# Altium PCB PCB1.PcbDoc
Units mil, origin at the board's own origin, x right, y up, seen from the top; angles counter-clockwise.
Board outline 1690 x 1775 mil, 2 copper layers (Top Layer, Bottom Layer); 25 components, 15 nets, 67 pads, 19 vias.
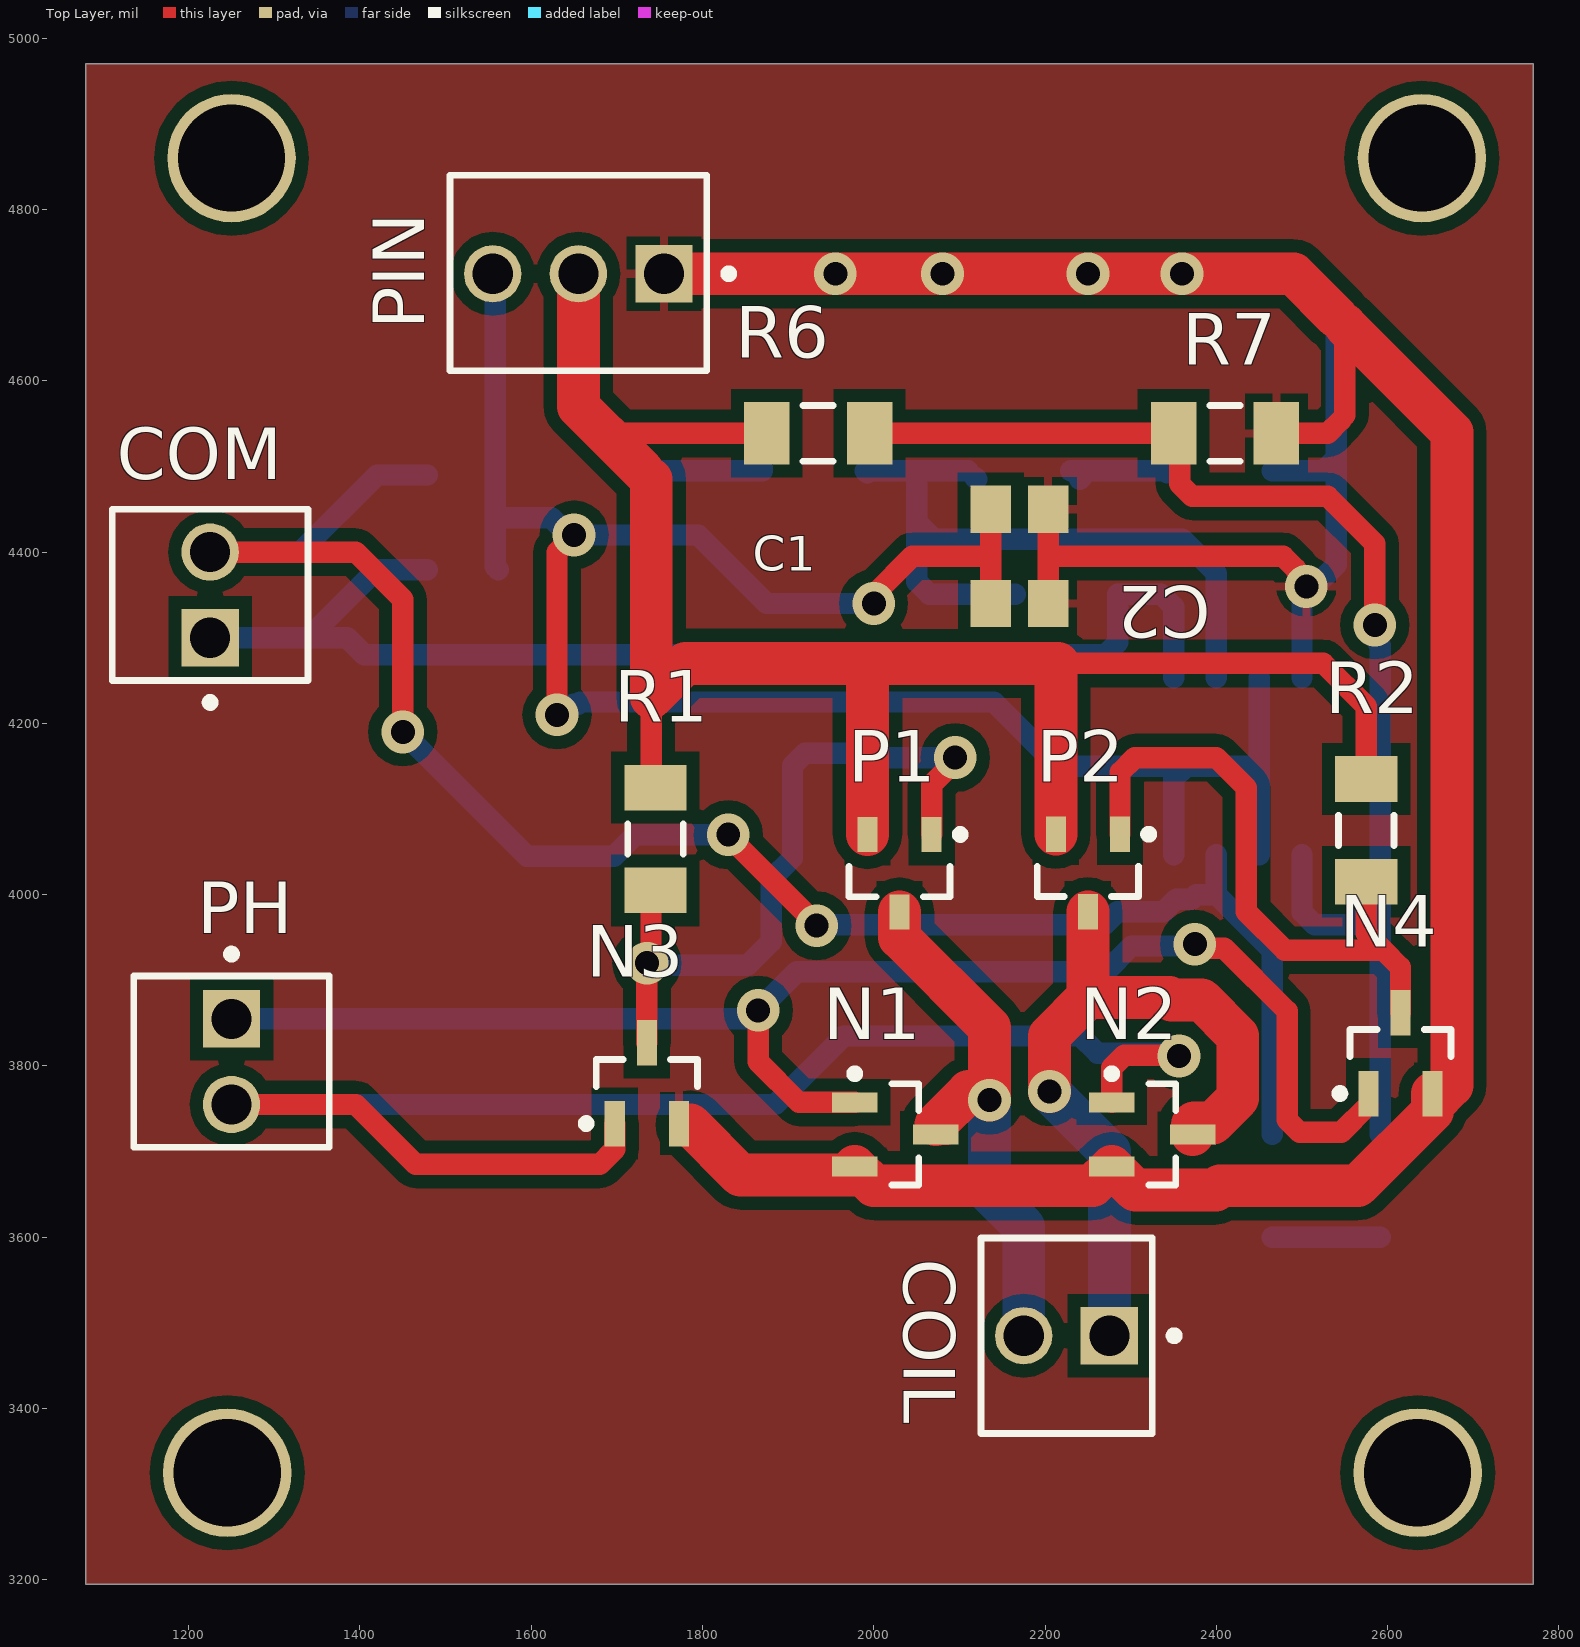
[diagram p0: Top Layer view]
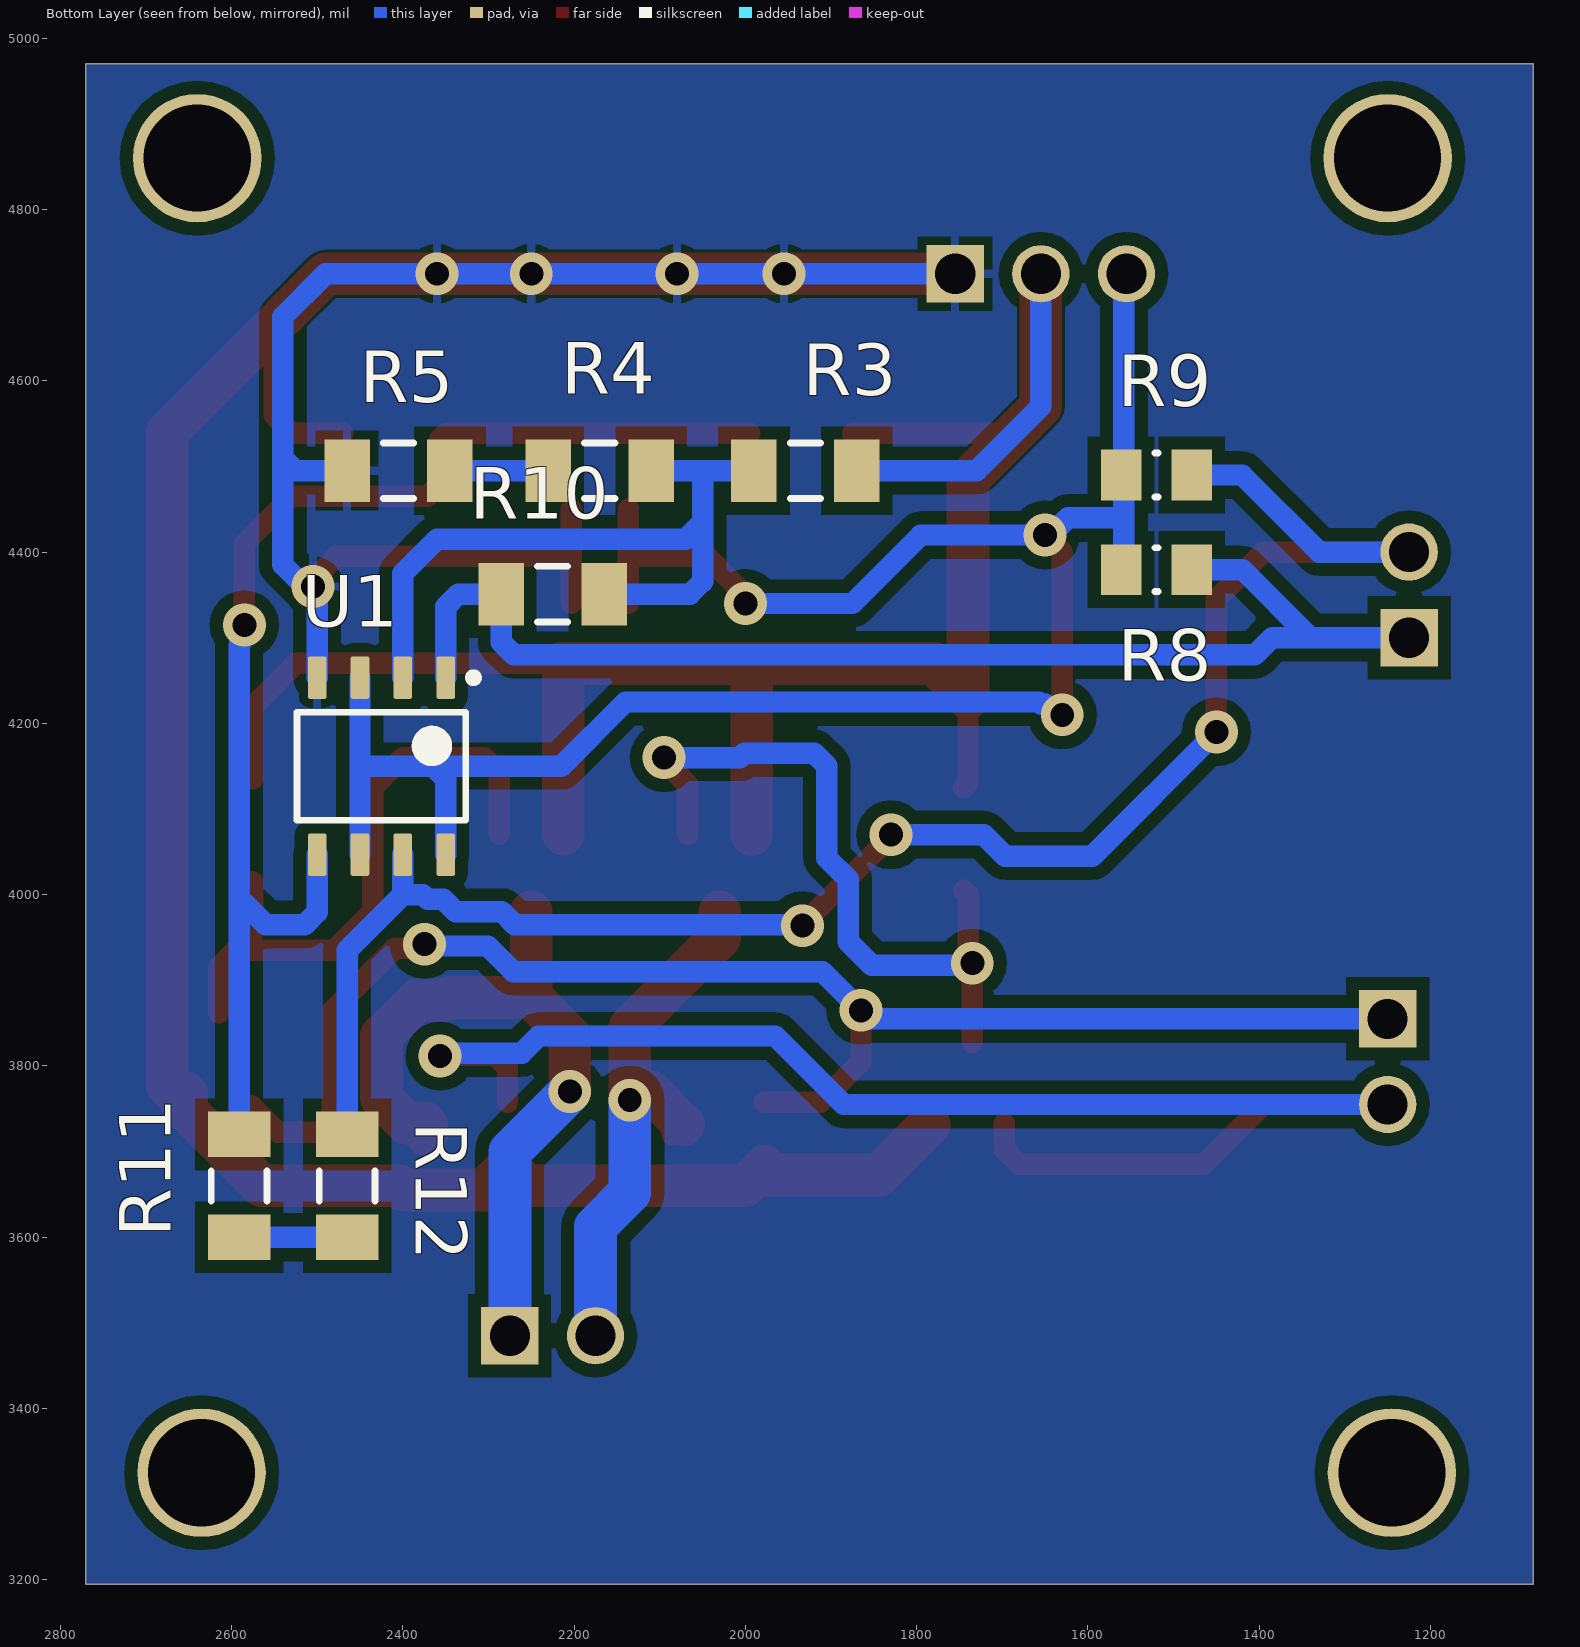
[diagram p1: Bottom Layer view, seen from below]
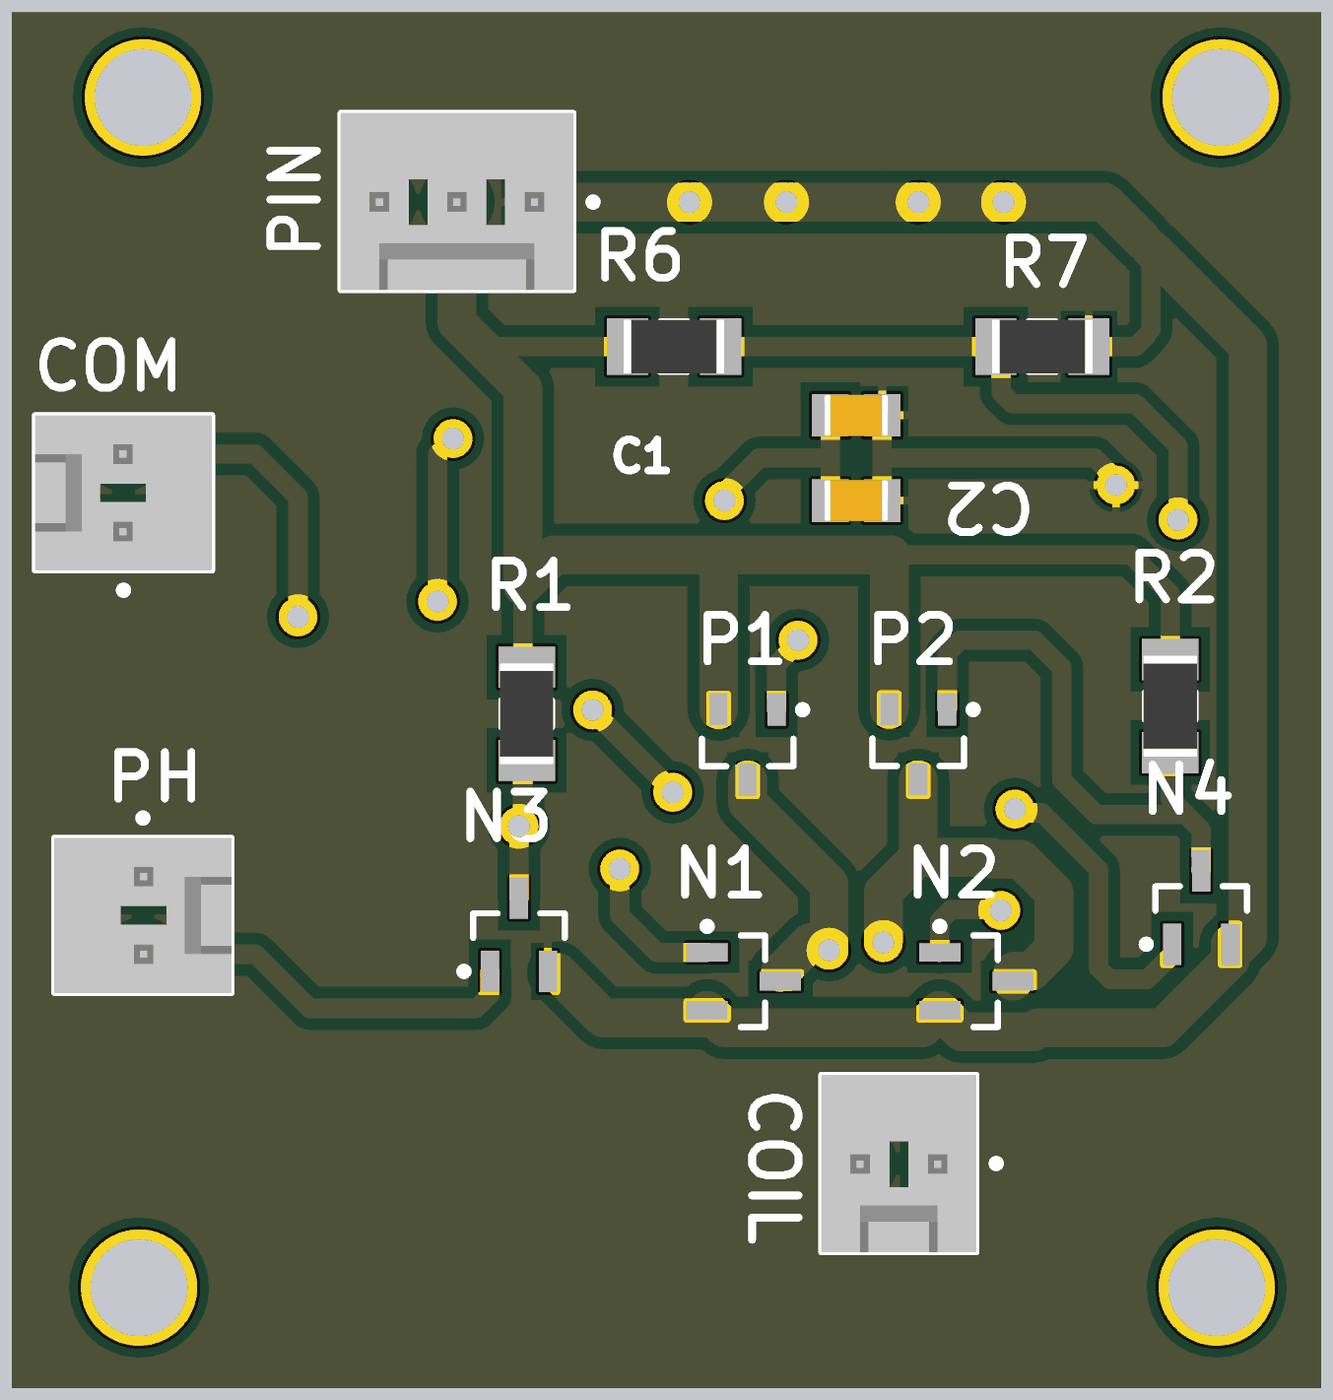
[diagram p2: 3D render of the assembled board from above, using the file's embedded part models]
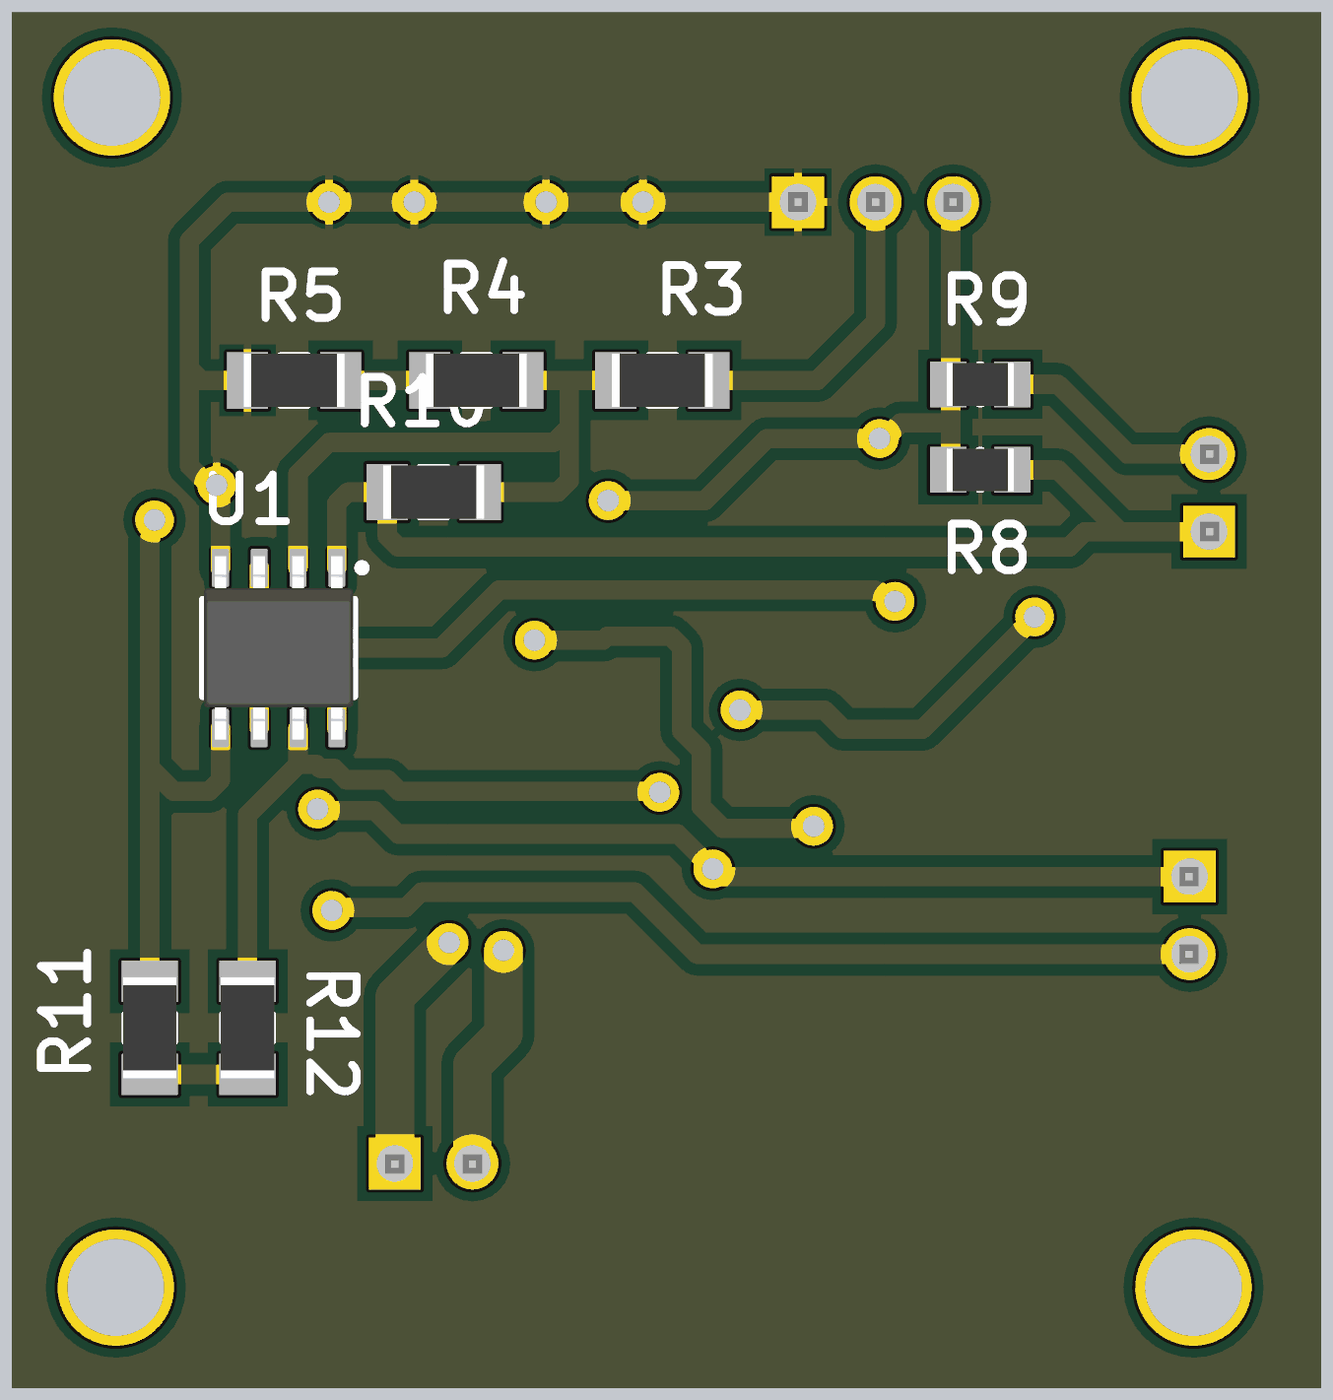
[diagram p3: 3D render of the assembled board from below, using the file's embedded part models]

## Layer stack, top to bottom
Top Solder: solder mask 0.4, Solder Resist, Dk 3.5
Top Layer: signal copper 1.4
Dielectric 1: dielectric 12.6, FR-4, Dk 4.8
Bottom Layer: signal copper 1.4
Bottom Solder: solder mask 0.4, Solder Resist, Dk 3.5

## Board outline
1080,3195 1080,4970 2770,4970 2770,3195

## Design rules (kind name [scope] priority, off if disabled: settings)
Clearance [All] p1: gap=15 ignorepadtopadclearanceinfootprint=FALSE
PolygonConnect [All] p1: connectstyle=Relief reliefconductorwidth=10 reliefentries=4 polygonreliefangle="90 Angle" airgapwidth=10
RoutingVias [All] p1: holewidth=28 width=50 viastyle="Through Hole" minholewidth=28 minwidth=50 maxholewidth=28 maxwidth=50
SolderMaskExpansion [All] p1: expansion=4 istentingtop=FALSE
Width [All] p1: maxlimit=50 minlimit=25 preferedwidth=25 minimp=50.000000 maximp=50.000000 favimp=50.000000
30 further rules are at their usual default settings.

## Components (designator, comment, footprint, x,y, rotation, side; value= is the part's Value field where it differs from the comment)
C1 "Capacitor 10 uF +/- 10% 16 V 0805" CAPC2013X135X45NL10T25 2170,4450 r180 top value=8n
C2 "Capacitor 10 uF +/- 10% 16 V 0805" CAPC2013X135X45NL10T25 2170,4340 r180 top value=8n
COIL "22-27-2021" MOLX-22-27-2021_V 2225,3485 r180 top
COM "22-27-2021" MOLX-22-27-2021_V 1225,4350 r90 top
N1 "2N7002" INF-PG-SOT23_M 2025,3720 r0 top
N2 "2N7002" INF-PG-SOT23_M 2325,3720 r0 top
N3 "2N7002" INF-PG-SOT23_M 1735,3780 r90 top
N4 "2N7002" INF-PG-SOT23_M 2615,3815 r90 top
P1 "BSS84P" INF-PG-SOT23_N 2030,4025 r270 top
P2 "BSS84P" INF-PG-SOT23_N 2250,4025.28 r270 top
PH "22-27-2021" MOLX-22-27-2021_V 1250,3805 r270 top
PIN "22-27-2031" MOLX-22-27-2031_V 1655,4725 r180 top
R1 "Resistor 100k +/-1% 1206 250 mW" RESC3216X60X45ML15T20 1745,4065 r90 top value=100k
R2 "Resistor 100k +/-1% 1206 250 mW" RESC3216X60X45ML15T20 2575,4075 r90 top value=100k
R3 "Resistor 100k +/-1% 1206 250 mW" RESC3216X60X45ML15T20 1930,4495 r180 bottom value=100k
R4 "Resistor 100k +/-1% 1206 250 mW" RESC3216X60X45ML15T20 2170,4495 r180 bottom value=100k
R5 "Resistor 100k +/-1% 1206 250 mW" RESC3216X60X45ML15T20 2405,4495 r180 bottom value=374K
R6 "Resistor 100k +/-1% 1206 250 mW" RESC3216X60X45ML15T20 1935,4538.62 r180 top value=100k
R7 "Resistor 100k +/-1% 1206 250 mW" RESC3216X60X45ML15T20 2410,4538.62 r180 top value=100k
R8 "Resistor 10k +/-1% 0805 125 mW" RESC2013X50X35ML15T15 1520,4379.6 r180 bottom value=10k
R9 "Resistor 10k +/-1% 0805 125 mW" RESC2013X50X35ML15T15 1520,4490 r180 bottom value=10k
R10 "Resistor 100k +/-1% 1206 250 mW" RESC3216X60X45ML15T20 2225,4350.95 r180 bottom value=100k
R11 "Resistor 100k +/-1% 1206 250 mW" RESC3216X60X45ML15T20 2591.15,3660 r90 bottom value=100k
R12 "Resistor 100k +/-1% 1206 250 mW" RESC3216X60X45ML15T20 2465,3660 r270 bottom value=33k
U1 "LM393M" D0008A_L 2425,4150 r270 bottom

## Footprints (in the part's own frame and the unit in brackets; to place one, negate y for a bottom-side part, rotate by r counter-clockwise, add the part's x,y. Pads: shape width x height; smd on the part's side, far side on the other; paste and mask are expansions set on the pad)
CAPC2013X135X45NL10T25 [mm] "Chip Capacitor, 2-Leads, Body 2.10x1.35mm, IPC Medium Density"
  rect 1.2x1.4 smd: 1(-0.85,0) 2(0.85,0)
  body extent -1.05,-0.67 1.05,0.67, height 1.35
D0008A_L [mm] "SOIC, 8-Leads, Body 5x4mm, Pitch 1.27mm, IPC High Density"
  rrect18% 1.25x0.55 smd: 1(-2.625,1.905) 2(-2.625,0.635) 3(-2.625,-0.635) 4(-2.625,-1.905) 5(2.625,-1.905) 6(2.625,-0.635) 7(2.625,0.635) 8(2.625,1.905)
  silkscreen extent -2.75,-2.5 1.6,2.85, body extent -3,-2.45 3,2.45, height 1.63
INF-PG-SOT23_M [mm] "SOT23, 3-Leads, Body 2.9x1.3mm, Pitch 0.95mm, IPC Low Density"
  rect 1.35x0.6 smd: 1(-1.2,0.95) 2(-1.2,-0.95) 3(1.2,0)
  silkscreen extent -1.32,-1.5 0.7,1.92, body extent -0.7,-1.5 0.7,1.5, height 1.1
INF-PG-SOT23_N [mm] "SOT23, 3-Leads, Body 2.9x1.3mm, Pitch 0.95mm, IPC Medium Density"
  rect 1.05x0.6 smd: 1(-1.15,0.95) 2(-1.15,-0.95) 3(1.15,0)
  silkscreen extent -1.27,-1.5 0.7,1.93, body extent -0.7,-1.5 0.7,1.5, height 1.1
MOLX-22-27-2021_V [mm] "Header, 2-Leads, Body 5.8x5.08mm"
  rect 1.7x1.7 hole 1.19: 1(-1.27,0)
  round 1.7 hole 1.19: 2(1.27,0)
  silkscreen extent -3.32,-2.9 2.54,2.9, body extent -2.54,-2.9 2.54,2.9, height 11.72
MOLX-22-27-2031_V [mm] "Header, 3-Leads, Body 7.62x5.8mm, Pitch 2.54mm"
  rect 1.7x1.7 hole 1.19 paste+0: 1(-2.54,0)
  round 1.7 hole 1.19 paste+0: 2(0,0) 3(2.54,0)
  silkscreen extent -4.59,-2.92 3.81,2.88, body extent -3.81,-2.92 3.81,2.88, height 11.71
RESC2013X50X35ML15T15 [mm] "Chip Resistor, 2-Leads, Body 2.2x1.4mm, IPC Low Density"
  rect 1.2x1.5 smd: 1(-1.05,0) 2(1.05,0)
  silkscreen extent -0.05,-0.65 0.05,0.65, body extent -1.1,-0.7 1.1,0.7, height 0.5
RESC3216X60X45ML15T20 [mm] "Chip Resistor, 2-Leads, Body 3.3x1.75mm, IPC Low Density"
  rect 1.35x1.85 smd: 1(-1.525,0) 2(1.525,0)
  silkscreen extent -0.45,-0.82 0.45,0.82, body extent -1.65,-0.87 1.65,0.87, height 0.6

## Part data
C1 C2: library part CMP-001-00015-6, "Chip Capacitor, 10 uF, +/- 10%, 16 V, 0805 (2012 Metric)", Capacitor Type=Ceramic, Case/Package=0805, Max Operating Temperature=85°C, Min Operating Temperature=-55°C, Tolerance=10%, Voltage Rating=16V, Mounting Technology=SM, Pins=2, RoHS Compliant=True
COIL COM PH: library part CMP-2000-05537-1, "Male Header, Pitch 2.54 mm, 1 x 2 Position, Height 11.7 mm, Tail Length 3.56 mm, 0 to 75 degC, RoHS, Bulk", Current - Max=4A, Manufacturer=Molex, Operating temperature=0°Cto+75°C, Package Description="2-Leads Header, Body 5.08 x 5.8 mm, Pitch 2.54 mm", Package Version="Rev. BC, 02/2012", PartNumber=0022272021, Voltage - Max=250V, Contact material=Tinplatedbrass, Current rating=4A, Datasheet URL=http://www.molex.com/pdm_docs/sd/022272021_sd.pdf, Datasheet Version="Rev. F, 06/2009", Housing material=Nylon(UL94V-0), Manufacturer URL=http://www.molex.com/, Mounting Technology=ThroughHole, No. of Positions=2, No. of Rows=1, Orientation=Vertical, Package Reference=22-27-2021, Pitch=2.54mm, Voltage Rating=250V
N1 N2 N3 N4: library part CMP-1149-00026-1, "N-Channel OptiMOS Small-Signal-Transistor, 60 V VDS, 0.3 A ID, -55 to 150 degC, PG-SOT23, Reel, Green", Manufacturer=Infineon, ComponentLink1Description="Manufacturer URL", ComponentLink1URL=http://www.infineon.com/, ComponentLink2Description=Datasheet, ComponentLink2URL=http://www.infineon.com/dgdl/2N7002_Rev2.4.pdf?folderId=db3a3043156fd573011622e10b5c1f67&fileId=db3a304319bc939a0119c2a9461e79e6, ComponentLink3Description="Package Specification", ComponentLink3URL=http://www.infineon.com/dgdl/SOT23-Package_Overview.pdf?folderId=db3a30431936bc4b0119532290053c66&fileId=db3a30431936bc4b0119533468123c85, DatasheetVersion="Rev. 2.4", Green=TRUE, Halogen-free=TRUE, ID (max)="0.3Â A", IDpuls (max)="1.2Â A", Mounting Technology="Surface Mount", PackageDescription="3-Pin Small Outline Transistor Package, 2.9 x 1.3 mm Body, 0.95 mm Pitch", PackageReference=PG-SOT23, PackageVersion=Apr-08, Packing=Reel, PartNumber=2N7002, Ptot (max)="0.5Â W", QG="0.4Â nC", RDS (on) (max)="3,000 mOhm", RDS (on) (max) (@4.5V)="4,000 mOhm", RthJA (max)="250 K/W", VDS (max)="60 V", VGS(th) (max)="2.5Â V", VGS(th) (min)="1.5Â V"
P1 P2: library part CMP-1099-00028-1, "P-Channel SIPMOS Small-Signal-Transistor, -60 V VDS, -0.17 A ID, -55 to 150 degC, PG-SOT23, Reel, Green", Manufacturer=Infineon, ComponentLink1Description="Manufacturer URL", ComponentLink1URL=http://www.infineon.com/, ComponentLink2Description=Datasheet, ComponentLink2URL=http://www.infineon.com/dgdl/BSS84P_Rev2.7%5B1%5D.pdf?folderId=db3a304314dca38901154a72e3951a65&fileId=db3a304330f68606013118ac7a9b4549, ComponentLink3Description="Package Specification", ComponentLink3URL=http://www.infineon.com/dgdl/SOT23-Package_Overview.pdf?folderId=db3a30431936bc4b0119532290053c66&fileId=db3a30431936bc4b0119533468123c85, DatasheetVersion="Rev. 2.7", Green=TRUE, Halogen-free=TRUE, ID (max)="-0.17Â A", IDpuls (max)="-0.68Â A", Mounting Technology="Surface Mount", PackageDescription="3-Pin Small Outline Transistor Package, 2.9 x 1.3 mm Body, 0.95 mm Pitch", PackageReference=PG-SOT23, PackageVersion=Apr-08, Packing=Reel, PartNumber=BSS84P, Pto t (max)="0.36Â W", QG="1Â nC", RDS (on) (max)="8,000Â mOhm", RDS (on) (max) (@4.5V)="12,000Â mOhm", Rth="350Â K/W", VDS (max)="-60Â V", VGS(th) (max)="-2Â V", VGS(th) (min)="-1Â V"
PIN: library part CMP-2000-05538-1, "Male Header, Pitch 2.54 mm, 1 x 3 Position, Height 11.7 mm, Tail Length 3.56 mm, -40 to 80 degC, RoHS, Bulk", Current rating=4A, Manufacturer=Molex, Operating temperature=0°Cto+75°C, Package Description="Male Header, Pitch 2.54 mm, 1 x 3 Position, Height 11.7 mm, Tail Length 3.56 mm", Voltage Rating=250V, Contact material=Tinplatedbrass, Datasheet URL=http://www.molex.com/webdocs/datasheets/pdf/en-us/0022272031_PCB_HEADERS.pdf, Datasheet Version=06/2016, Housing material=Nylon(UL94V-0), Manufacturer URL=http://www.molex.com/, Mounting Technology=ThroughHole, Package Reference=22-27-2031, Package URL=http://www.molex.com/pdm_docs/sd/022272031_sd.pdf
R1 R2 R3 R4 R5 R6 R7 R10 R11 R12: library part CMP-009-00025-5, "Chip Resistor, 100 KOhm, +/- 1%, 0.25 W, -55 to 155 degC, 1206 (3216 Metric)", Case/Package=1206, Max Operating Temperature=155°C, Min Operating Temperature=-55°C, Power=250mW, Tolerance=1%, Voltage Rating=200V, Mounting Technology=SM, Pins=2, RoHS Compliant=True
R8 R9: library part CMP-009-00018-5, "Chip Resistor, 10 KOhm, +/- 1%, 125 mW, -55 to 155 degC, 0805 (2012 Metric)", Case/Package=0805, Max Operating Temperature=155°C, Min Operating Temperature=-55°C, Power=125mW, Tolerance=1%, Voltage Rating=150V, Mounting Technology=SM, Pins=2, RoHS Compliant=True
U1: library part CMP-0055-00682-3, "Low Power Low Offset Voltage Dual Comparator, 8-pin Narrow SOIC", Manufacturer="Texas Instruments", Package Reference=D0008A, PackageTopMarking=NSZXTT*LM*393M, PowerWise=N, Code_IPC=SOIC127P600-8, Code_JEDEC=MS-012-AA, ComponentLink1Description="Datasheet URL", ComponentLink1URL=http://www.ti.com/general/docs/lit/getliterature.tsp?genericPartNumber=LM393-N&fileType=pdf, CompType=Amplifiers, PackageDescription="SOIC Narrow, 4.9 x 3.9 x 1.45mm, 8 Lead, 1.27mm Pitch", PinCount=8, RoHS=N

## Free pads (board coordinates)
  round 150 hole 125: 26(1245,3325) 26(1250,4860) 26(2635,3325) 26(2640,4860)

## Via types
v1: diameter 50, hole 28, Top Layer to Bottom Layer, 19 vias

## Nets (pads, with @x,y where several pads share a name; then routed paths per layer and width w, separated by ;. In a path a pad name is that pad's centre, name@x,y a point inside that pad or via, vN(x,y) a via of type N, cw(c..) or ccw(c..) an arc to the next point about the centre after c; other vN are vias at no path point)
GND: C1.1 C2.1 N1.2 N2.2 N3.2 N4.2 PIN.1 R5.1 R7.1 U1.4 | length 4697.2
  Top Layer w25: C2.1 2203.46,4395 ; C1.1 2203.46,4395 ; R7.1 2530,4538.62 2545,4553.62 ; v1(2505,4360) 2505,4366.76 2492.5,4379.26 2492.5,4380.36 2477.86,4395 2203.46,4395 ; 2550,4560 2550,4665
  Top Layer w50: PIN.1 v1(1955,4725) v1(2080,4725) v1(2250,4725) v1(2360,4725) 2490,4725 2540,4675 ; 1785.59,3731.18 1844.21,3672.56 N1.2@1976.18,3672.56 ; N1.2 2000.35,3660 2255.16,3660 N2.2 2305.35,3655 2399.17,3655 2404.17,3660 2565,3660 2652.4,3747.4 N4.2@2652.4,3754.68 ; 2550,4665 2675,4540 2675,3777.27 N4.2@2652.4,3754.68 ; N4.2 N4.2@2652.4,3754.68
  Bottom Layer w25: PIN.1 v1(1955,4725) v1(2080,4725) v1(2250,4725) v1(2360,4725) 2490,4725 2540,4675 2540,4509.64 ; R5.1 2525.36,4495 2540,4509.64 ; U1.4 2500,4345 2540,4385 2540,4509.64
H1: N2.1 N3.1 PH.2 | length 1788.9
  Top Layer w25: PH.2 1395,3755 1465,3685 1680,3685 1697.6,3702.6 N3.1 ; N2.1 2277.76,3797.76 2292.4,3812.4 2355.53,3812.4 v1(2356.46,3811.46)
  Bottom Layer w25: PH.2 1885,3755 1965,3835 2241.18,3835 2261.18,3815 2352.93,3815 v1(2356.46,3811.46)
H2: N1.1 N4.1 PH.1 | length 1748
  Top Layer w25: PH.1@1240,3865 PH.1 ; v1(1865,3865) 1865,3805 1912.6,3757.4 N1.1 ; v1(2374.76,3942.18) 2379.55,3937.39 2409.28,3937.39 2482.5,3864.17 2482.5,3737.14 2497.14,3722.5 2545.73,3722.5 N4.1@2576.91,3753.68
  Bottom Layer w25: PH.1 1855,3855 v1(1865,3865) 1910,3910 2270.86,3910 2300.86,3940 2372.59,3940 v1(2374.76,3942.18)
IN: P1.2 P2.2 PIN.2 R1.2 R2.2 R3.2 R6.2 | length 2587
  Top Layer w25: 1691.69,4538.62 R6.2 ; 1730,4495 1740,4485 ; 1740,4230 1740,4130.04 R1.2 ; 1992.6,4267.6 1995,4270 ; 2212.6,4267.6 2215,4270 2525,4270 2575,4220 R2.2
  Top Layer w50: PIN.2 1655,4570 1689.04,4535.96 1730,4495 ; 1740,4485 1740,4230 1780,4270 1995,4270 2215,4270 ; P1.2 1992.6,4267.6 ; P2.2 2212.6,4267.6
  Bottom Layer w25: PIN.2 1655,4570 1730,4495 1865,4495 1869.96,4499.96 R3.2
NetN3_3: N3.3 P1.1 R1.1 | length 854.3
  Top Layer w25: N3.3 v1(1735,3920) 1739.78,3924.78 1739.78,3999.74 R1.1 ; P1.1 2067.4,4128.44 2095,4156.04 v1(2095,4160)
  Bottom Layer w25: v1(1735,3920) 1737.5,3917.5 1852.5,3917.5 1880,3945 1880,4017.82 1905,4042.82 1905,4150.36 1919.64,4165 2001.44,4165 2006.44,4160 v1(2095,4160)
NetN4_3: N4.3 P2.1 R2.1 | length 734.4
  Top Layer w25: P2.1 2287.4,4142.76 2304.64,4160 2400,4160 2435,4125 2435,3980 2480,3935 2595,3935 ; R2.1 2575,3955 2595,3935 ; N4.3 2615,3915 2595,3935
NetR3_1: R3.1 R4.2 R10.2 U1.2 | length 873.9
  Bottom Layer w25: R3.1@1992.54,4492.5 R3.1 2050,4495 ; R4.2 2050,4495 ; R4.2@2117.88,4487.5 R4.2@2120.38,4485 ; R10.2 2064.64,4350.95 2050,4365.6 2050,4435 ; U1.2 2400,4375 2360,4415 2070,4415 2050,4435 ; 2050,4435 2050,4465 2050,4495
NetR4_1: R4.1 R5.2 | length 122
  Bottom Layer w25: R4.1 R5.2 R5.2@2342.46,4492.5 ; R4.1@2240.46,4485 R4.1@2242.96,4487.5
NetR6_1: R6.1 R7.2 R11.2 U1.5 | length 1543.3
  Top Layer w25: R6.1 2340,4538.62 R7.2 2357.01,4531.56 2357.01,4479.64 2371.66,4465 2530,4465 2585,4410 v1(2585,4315)
  Bottom Layer w25: U1.5 2500,3979.64 2514.64,3965 2560,3965 2585,3990 2591.15,3983.85 ; v1(2585,4315) 2589.78,4310.22 2589.78,4292.54 2591.15,4291.17 2591.15,3983.85 ; R11.2 2591.15,3983.85
NetR11_1: R11.1 R12.2 | length 126.2
  Bottom Layer w25: R12.2 R11.1
OUT1: COIL.2 N1.3 P1.3 | length 622.5
  Top Layer w25: N1.3 N1.3@2085.63,3720
  Top Layer w50: P1.3 2030,3950 2135,3845 v1(2135,3760) ; N1.3@2072.24,3731.61 2110.63,3770
  Bottom Layer w50: v1(2135,3760) 2135,3652.29 2175,3612.29 COIL.2
OUT2: COIL.1 N2.3 P2.3 | length 885.9
  Top Layer w50: v1(2205,3770) 2205,3835 2250,3880 ; P2.3 2250,3880 ; N2.3 2372.24,3731.61 2373.82,3733.19 2395.71,3733.19 2425,3762.48 2425,3834.85 2382.68,3877.18 2347.84,3877.18 2345.02,3880 2250,3880
  Bottom Layer w50: v1(2205,3770) 2275,3700 COIL.1
VCC: C1.2 C2.2 PIN.3 R8.1 R9.1 U1.3 U1.6 U1.8 | length 2498.1
  Top Layer w25: v1(1630,4210) 1630,4400 v1(1650,4420) ; v1(2000,4340) 2000,4350 2045,4395 2136.54,4395 ; C2.2 2136.54,4395 ; C1.2 2136.54,4395
  Bottom Layer w25: PIN.3 1558.17,4721.83 1558.17,4440 ; R8.1 1558.17,4382.77 1558.17,4440 ; v1(1630,4210) 1636.76,4210 1649.26,4222.5 1654.64,4222.5 1657.14,4225 2140,4225 2215,4150 2364.64,4150 ; v1(2000,4340) 1875,4340 1795,4420 v1(1650,4420) 1643.24,4420 1623.24,4440 1558.17,4440 ; U1.8 2350,4135.36 2364.64,4150 ; U1.6 2450,4150 ; U1.3 2450,4150 ; 2364.64,4150 2450,4150
VH: COM.2 R9.2 R12.1 U1.7 | length 2128.4
  Top Layer w25: COM.2 1395,4400 1450,4345 v1(1450,4190) ; v1(1830,4070) 1830,4068.52 1933.31,3965.21 v1(1933.31,3963.73)
  Bottom Layer w25: COM.2 1330,4400 1420,4490 R9.2 ; v1(1450,4190) 1595,4045 1696.62,4045 1721.62,4070 v1(1830,4070) ; v1(1933.31,3963.73) 1934.57,3965 2269.29,3965 2284.29,3980 2338.34,3980 2352.89,3994.55 2371.08,3994.55 2376.53,4000 2400,4000 ; U1.7 2400,4000 ; R12.1 2465,3935 2400,4000
VL: COM.1 R8.2 R10.1 U1.1 | length 1456.3
  Bottom Layer w25: COM.1 1340,4300 ; R8.2 1419.6,4379.6 1340,4300 ; U1.1 2350,4336.31 2335.36,4350.95 R10.1 2285.04,4294.64 2270.39,4280 1405,4280 1385,4300 1340,4300

## Polygon pours and split planes (outlines as drawn)
GND on Bottom Layer "GND_L02_P001" (solid, pour order 1): 1080,3195 1080,4970 2770,4970 2770,3195
GND on Top Layer "GND_L01_P002" (solid, pour order 2): 1080,3195 1080,4970 2770,4970 2770,3195

## Silkscreen, mask and mechanical layers (free items; w line width, h text height)
Mechanical 1:
  lines w10: 1080,3195 2770,3195 2770,4970 1080,4970 1080,3195
  lines w47.24: 1056.38,3195 ccw(c1080,3195) 1080,3171.38 ; 1056.38,3195 ccw(c1080,3195) 1080,3171.38 ; 1056.38,3195 1056.38,4970 ; 1056.38,4970 cw(c1080,4970) 1080,4993.62 ; 1056.38,4970 cw(c1080,4970) 1080,4993.62 ; 1080,3171.38 2770,3171.38 ; 1080,4993.62 2770,4993.62 ; 2770,3171.38 ccw(c2770,3195) 2793.62,3195 ; 2770,3171.38 ccw(c2770,3195) 2793.62,3195 ; 2770,4993.62 cw(c2770,4970) 2793.62,4970 ; 2770,4993.62 cw(c2770,4970) 2793.62,4970 ; 2793.62,3195 2793.62,4970